# Altium PCB PCB1.PcbDoc
Units mm, origin at the board's own origin, x right, y up, seen from the top; angles counter-clockwise.
Board outline 40 x 40 mm, 2 copper layers (Top Layer, Bottom Layer); 64 components, 73 nets, 336 pads, 67 vias.
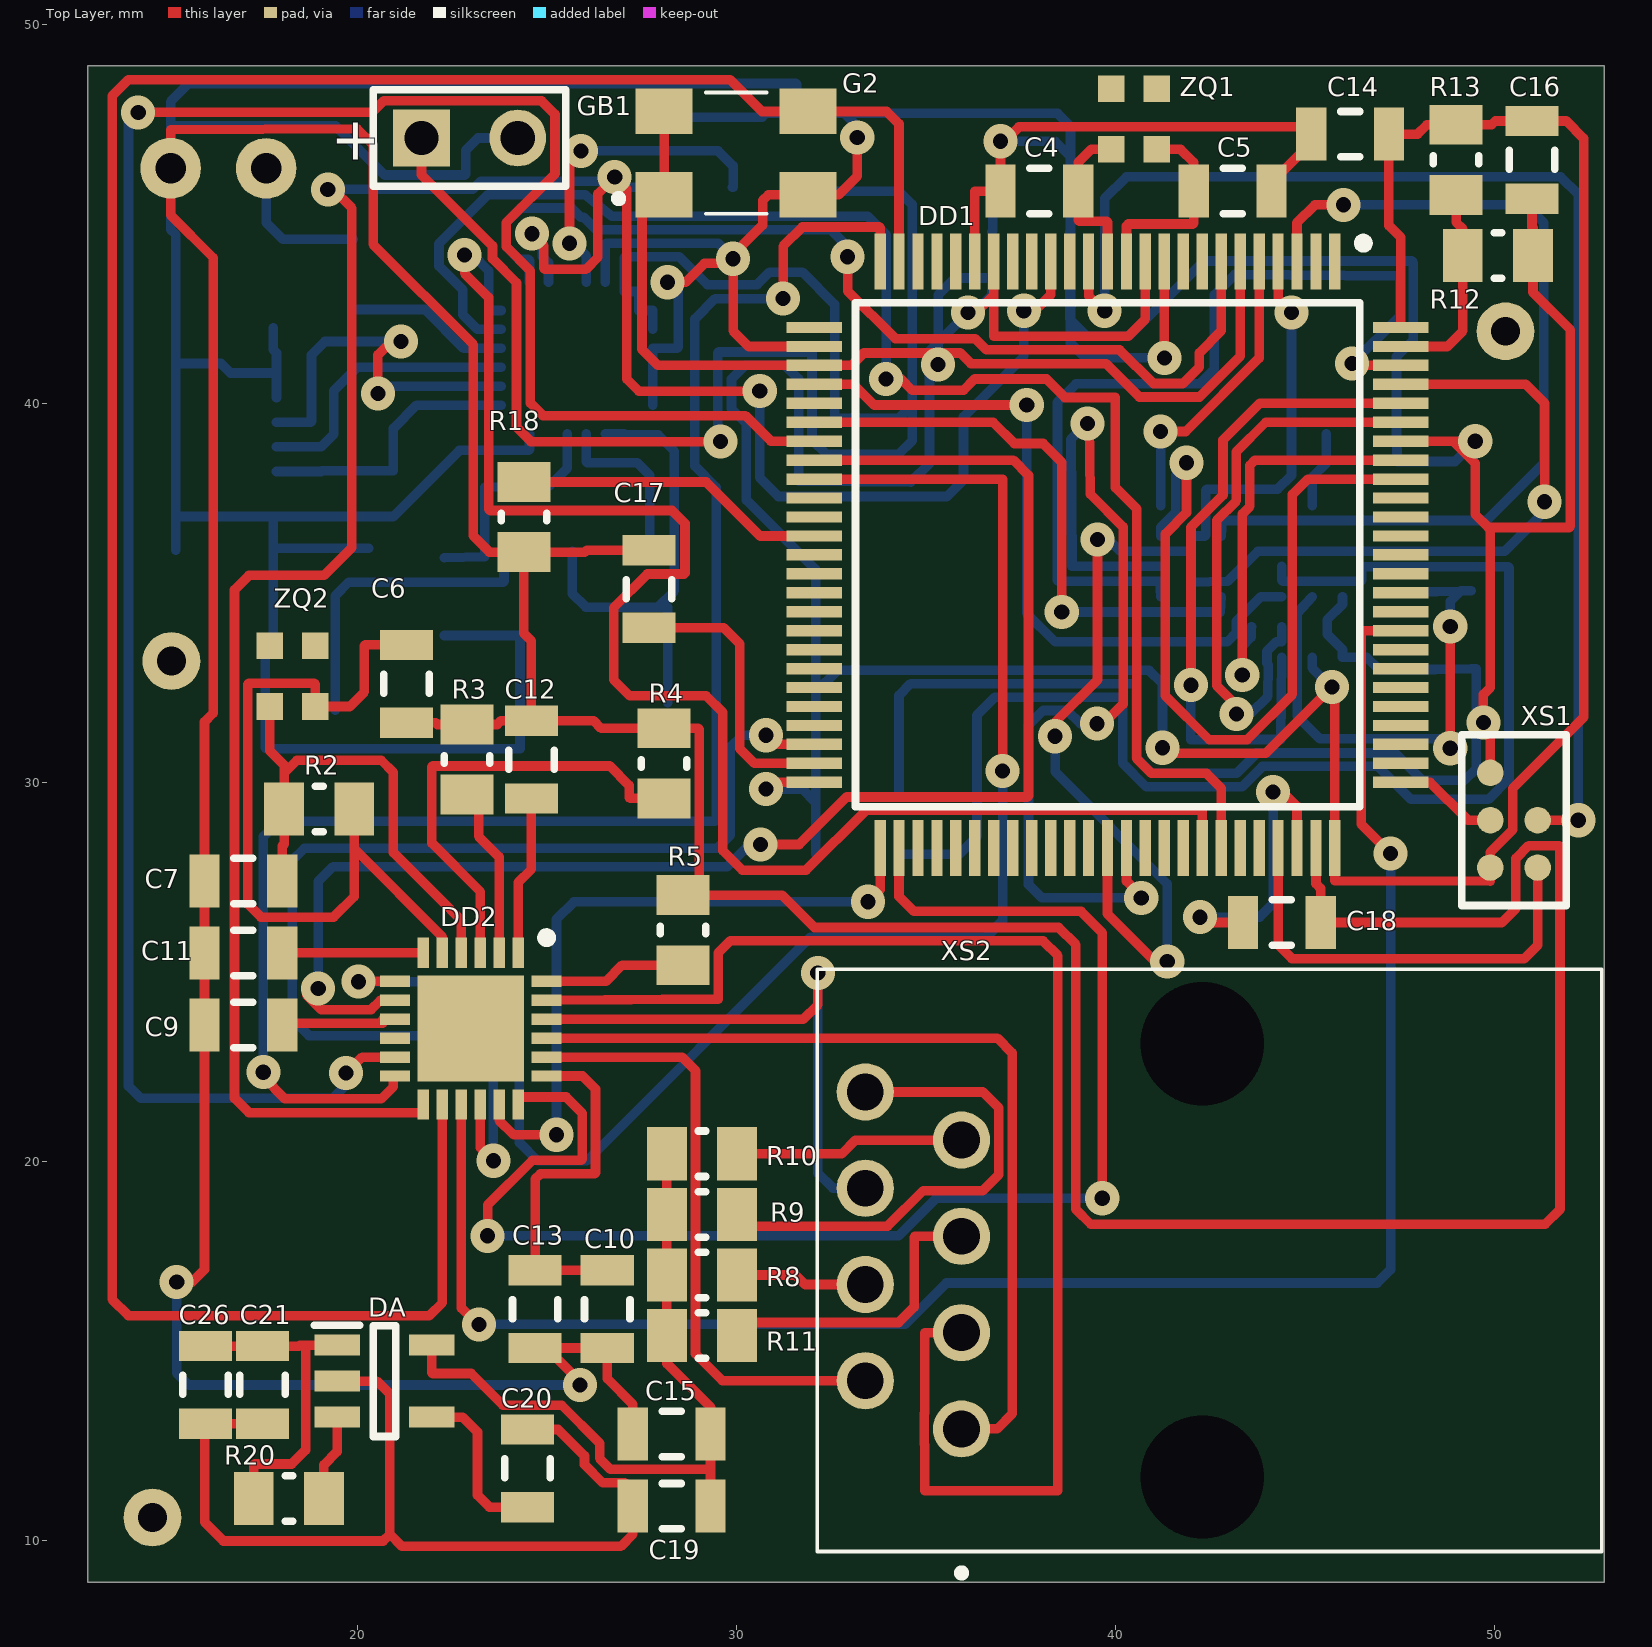
[diagram p0: Top Layer view]
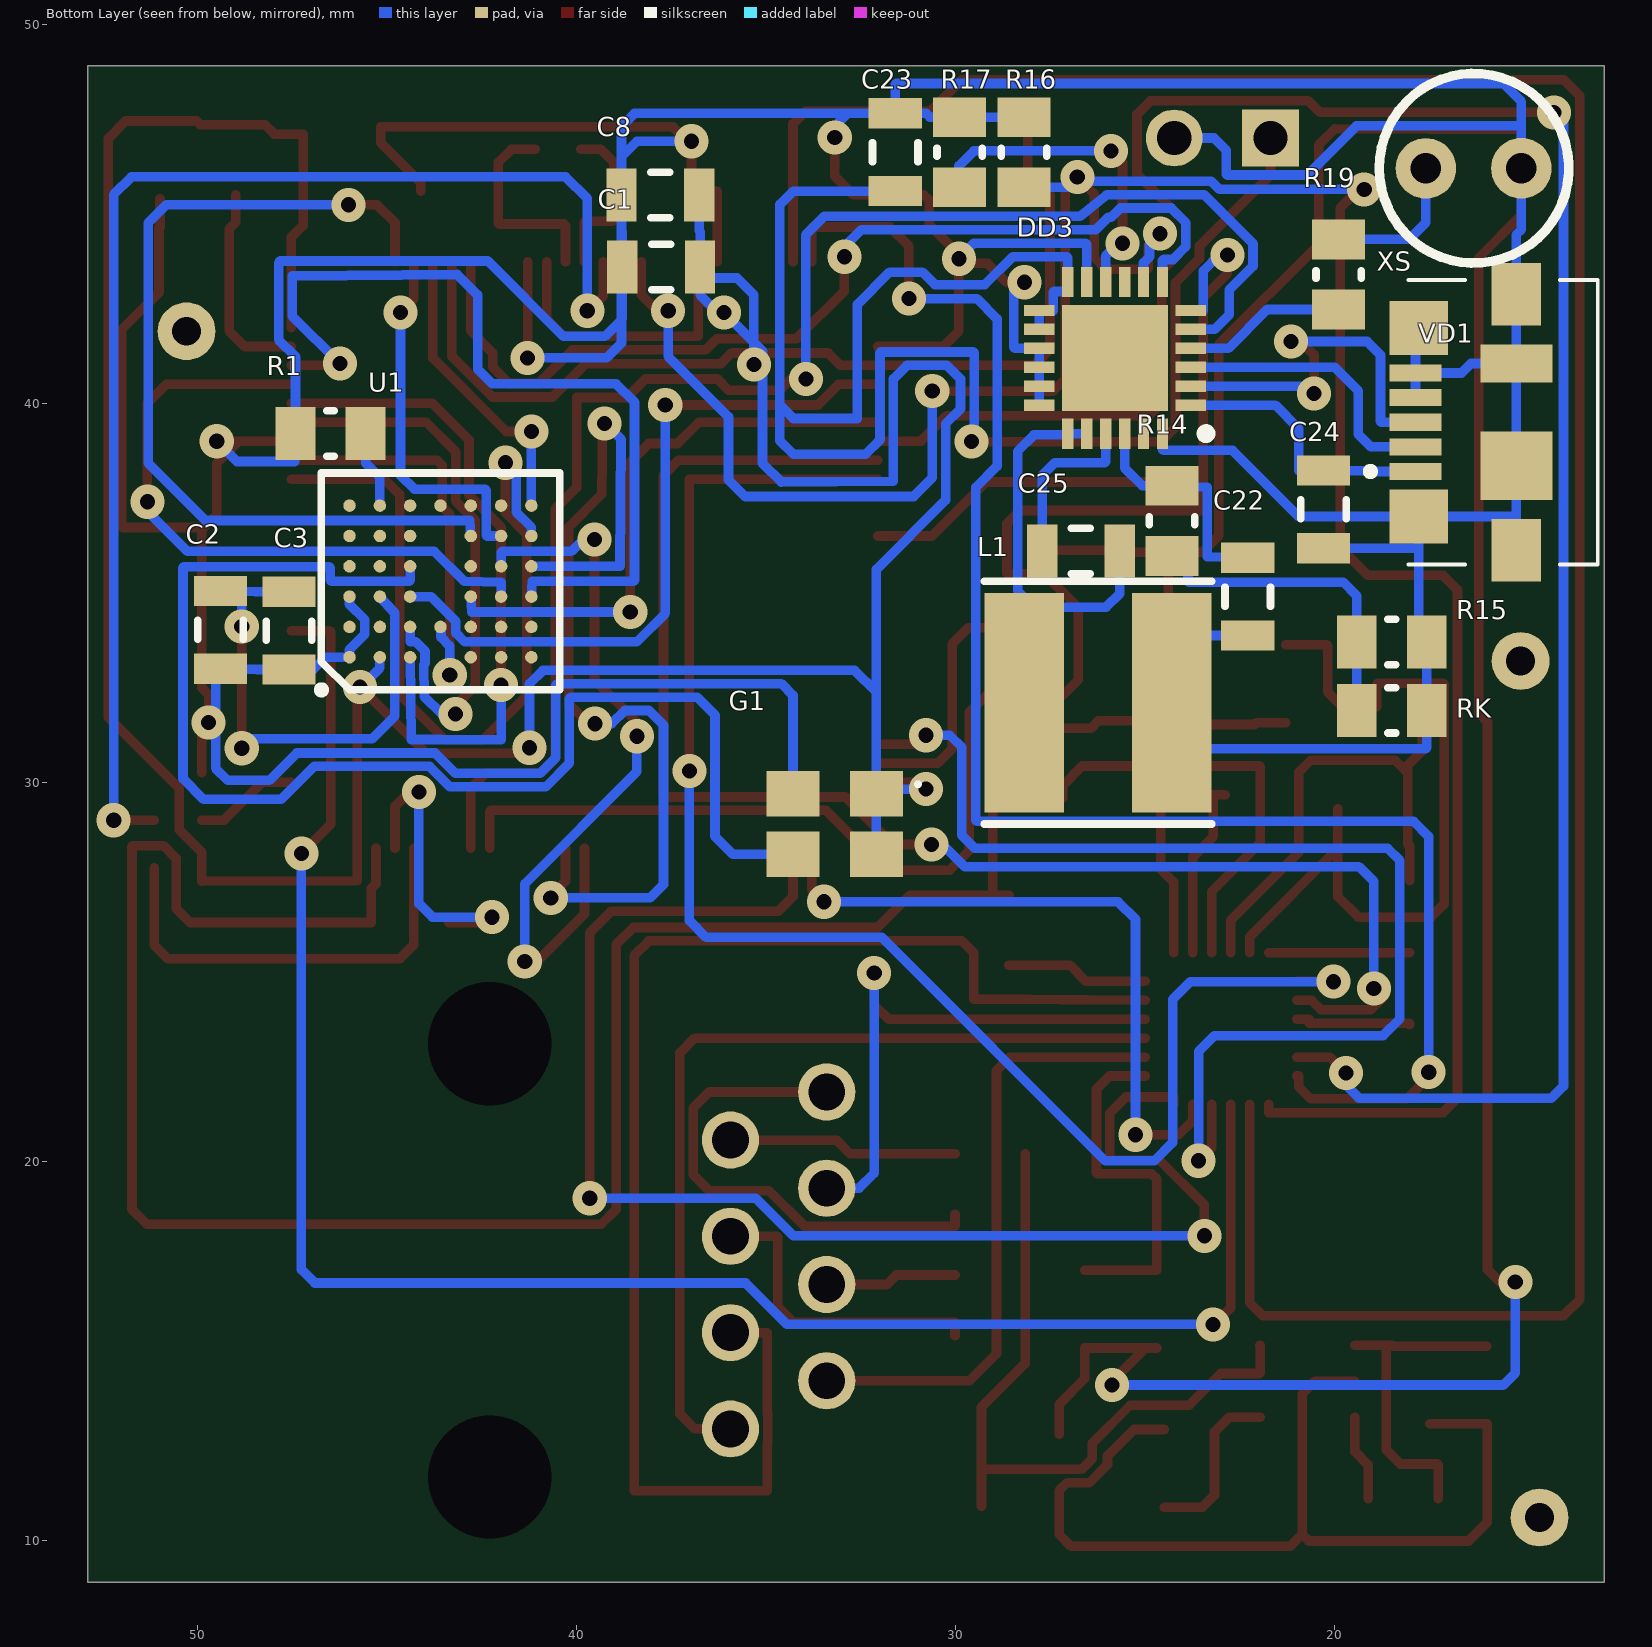
[diagram p1: Bottom Layer view, seen from below]

## Layer stack, top to bottom
Top Solder: solder mask 0.0102, Solder Resist, Dk 3.5
Top Layer: signal copper 0.0356
Dielectric 1: dielectric 0.32, FR-4, Dk 4.8
Bottom Layer: signal copper 0.0356
Bottom Solder: solder mask 0.0102, Solder Resist, Dk 3.5

## Board outline
52.9,8.9 12.9,8.9 12.9,48.9 52.9,48.9

## Design rules (kind name [scope] priority, off if disabled: settings)
Clearance [All] p1: gap=0.1 ignorepadtopadclearanceinfootprint=FALSE
ComponentClearance [All] p1: gap=0.1 collisioncheckmode=3 verticalgap=1 showdistances=FALSE
HoleSize [All] p1: absolutevalues=TRUE maxlimit=3.5 minlimit=0.4 maxpercent=80.000 minpercent=20.000
MinimumSolderMaskSliver [All] p1: minsoldermaskwidth=0.1
PolygonConnect [All] p1: connectstyle=Relief reliefconductorwidth=0.3 reliefentries=4 polygonreliefangle="90 Angle" airgapwidth=0.25
RoutingVias [All] p1: holewidth=0.4 width=0.9 viastyle="Through Hole" minholewidth=0.4 minwidth=0.9 maxholewidth=0.4 maxwidth=0.9
SilkToSolderMaskClearance [IsPad] p1: minsilkscreentomaskgap=0.2 clearancetoexposedcopper=TRUE
SolderMaskExpansion [All] p1: expansion=0.1
Width [All] p1: maxlimit=0.8 minlimit=0.2 preferedwidth=0.254
26 further rules are at their usual default settings.

## Classes and differential pairs
component class Sheet1: C1 C2 C3 C4 C5 C6 C7 C8 C9 C10 C11 C12 C13 C14 C15 C16 C17 C18 C19 C20 C21 C22 C23 C24 C25 C26 DA DD1 DD2 DD3 G1 G2 GB1 L1 R1 R2 R3 R4 R5 R8 R9 R10 R11 R12 R13 R14 R15 R16 R17 R18 R19 R20 RK U1 VD1 XS XS1 XS2 ZQ1 ZQ2

## Components (designator, comment, footprint, x,y, rotation, side; value= is the part's Value field where it differs from the comment)
C1 "" "0805 (Capacitor)" 37.775,43.6 r180 bottom
C2 "" "0805 (Capacitor)" 49.4,34.025 r90 bottom
C3 "" "0805 (Capacitor)" 47.6,34 r90 bottom
C4 "" "0805 (Capacitor)" 38,45.6 r0 top
C5 "" "0805 (Capacitor)" 43.1,45.6 r180 top
C6 "" "0805 (Capacitor)" 21.3,32.6 r90 top
C7 "" "0805 (Capacitor)" 17,27.4 r0 top
C8 "" "0805 (Capacitor)" 37.8,45.5 r0 bottom
C9 "" "0805 (Capacitor)" 17,23.6 r180 top
C10 "" "0805 (Capacitor)" 26.6,16.1 r90 top
C11 "" "0805 (Capacitor)" 17,25.5 r180 top
C12 "" "0805 (Capacitor)" 24.6,30.6 r90 top
C13 "" "0805 (Capacitor)" 24.7,16.1 r90 top
C14 "" "0805 (Capacitor)" 46.2,47.1 r180 top
C15 "" "0805 (Capacitor)" 28.3,12.8 r0 top
C16 "" "0805 (Capacitor)" 51,46.425 r270 top
C17 "" "0805 (Capacitor)" 27.7,35.1 r90 top
C18 "" "0805 (Capacitor)" 44.4,26.3 r0 top
C19 "" "0805 (Capacitor)" 28.3,10.9 r180 top
C20 "" "0805 (Capacitor)" 24.5,11.9 r90 top
C21 "" "0805 (Capacitor)" 17.5,14.1 r90 top
C22 "" "0805 (Capacitor)" 22.3,34.9 r270 bottom
C23 "" "0805 (Capacitor)" 31.6,46.625 r90 bottom
C24 "" "0805 (Capacitor)" 20.3,37.2 r270 bottom
C25 "" "0805 (Capacitor)" 26.7,36.1 r0 bottom
C26 "" "0805 (Capacitor)" 16,14.1 r90 top
DA "AP2202K-ADJTRG1" SOT95P280X145-5N 20.725,14.2 r0 top
DD1 "STM32F407VGT6" QFP50P1600X1600X160-100N 39.8,36 r270 top
DD2 "LAN8720ACP" QFN50P400X400X100-25N-D 23,23.5 r270 top
DD3 "BQ24295RGER" QFN50P400X400X100-25N-D 25.8,41.2 r0 bottom
G1 "403C11A24M00000" 403C11A20M00000 33.2,28.9 r0 bottom
G2 "405C11A25M00000" 405C11A25M00000 30,46.6 r0 top
GB1 "" Battery 18.43,47.818 r0 top
L1 "Fixed inductor, , , 0603, 50mA, -55...+125°C" "IND: SDR0604" 26.25,32.1 r0 bottom
R1 "" "0805 (Resistor)" 46.5,39.2 r180 bottom
R2 "" "0805 (Resistor)" 19,29.3 r180 top
R3 "" "0805 (Resistor)" 22.9,30.6 r270 top
R4 "" "0805 (Resistor)" 28.1,30.5 r270 top
R5 "" "0805 (Resistor)" 28.6,26.1 r90 top
R8 "" "0805 (Resistor)" 29.1,17 r0 top
R9 "" "0805 (Resistor)" 29.1,18.6 r0 top
R10 "" "0805 (Resistor)" 29.1,20.2 r0 top
R11 "" "0805 (Resistor)" 29.1,15.4 r0 top
R12 "" "0805 (Resistor)" 50.1,43.9 r180 top
R13 "" "0805 (Resistor)" 49,46.425 r90 top
R14 "" "0805 (Resistor)" 24.3,36.9 r90 bottom
R15 "" "0805 (Resistor)" 18.5,33.7 r0 bottom
R16 "" "0805 (Resistor)" 28.2,46.625 r90 bottom
R17 "" "0805 (Resistor)" 29.9,46.625 r270 bottom
R18 "" "0805 (Resistor)" 24.4,37 r90 top
R19 "" "0805 (Resistor)" 19.9,43.4 r90 bottom
R20 "" "0805 (Resistor)" 18.2,11.1 r180 top
RK "" "0805 (Resistor)" 18.5,31.9 r0 bottom
U1 "OV9655(2640)" BGA38C80P6X7_572X628X96 43.6,35.3 r90 bottom
VD1 "LED, Green, *, *, *, -55...+150°C" LED 18.33,44.202 r180 bottom
XS "0473461001" 0473461001 15.9,39.5 r90 bottom
XS1 "SWD" SWD 50.4,28.5 r90 top
XS2 "SS-6488-FLS" SS6488FLS 35.95,12.94 r90 top
ZBOAS141392602 "Comment" "BOASVIEWdrill:Таблица отверстий:0:0:0:0" 35.9,2352.1 r0 top
ZBOAS268594952 "Слой 1" "BOASVIEWlayer:Top Layer:2:1:1:1" 68.2,2411.8 r0 top (schematic designator fewf)
ZBOAS743798106 "Comment" "BOASVIEWside:Вид платы слева:2:0:0:0" 188.9,2491.9 r0 top
ZBOAS923294952 "Слой 2" "BOASVIEWlayer:Bottom Layer:2:1:32:1" 234.5,2411.8 r0 top (schematic designator fewf)
ZQ1 "Crystal, , 6pF, ±50ppm, case 2016, -30...+85°C" "OSC: 2016" 40.5,47.5 r90 top
ZQ2 "Crystal, , 6pF, ±50ppm, case 2016, -30...+85°C" "OSC: 2016" 18.3,32.8 r90 top

## Footprints (in the part's own frame and the unit in brackets; to place one, negate y for a bottom-side part, rotate by r counter-clockwise, add the part's x,y. Pads: shape width x height; smd on the part's side, far side on the other; paste and mask are expansions set on the pad)
403C11A20M00000 [mm]
  rect 1.4x1.2 smd: 1(-1.1,-0.8) 2(1.1,-0.8) 3(1.1,0.8) 4(-1.1,0.8)
  silkscreen extent -2.25,-1.1 -2.15,-1, body extent -1.68,-1.28 1.68,1.28, height 0.85
405C11A25M00000 [mm]
  rect 1.5x1.2 smd: 1(-1.9,-1.1) 2(1.9,-1.1) 3(1.9,1.1) 4(-1.9,1.1)
  silkscreen extent -3.2,-1.6 0.8,1.6, body extent -2.53,-1.6 2.53,1.6, height 1.1
"0805 (Capacitor)" [mm] "Chip Capacitor, 2-Leads, Body 2,00x1,25mm, IPC Medium Density"
  rect 0.8x1.4 smd: 1(-1.025,0) 2(1.025,0)
  silkscreen extent -0.25,-0.6 0.25,0.6, body extent -0.97,-0.62 1.03,0.63, height 0.78
"0805 (Resistor)" [mm] "Chip Resistor, 2-Leads, Body 2,10x1,30mm, IPC Medium Density"
  rect 1.05x1.4 smd: 1(-0.925,0) 2(0.925,0)
  silkscreen extent -0.1,-0.6 0.1,0.6, body extent -0.98,-0.63 1.02,0.62, height 0.5
0473461001 [mm]
  rect 0.45x1.38 smd: 1(-1.3,1.975) 2(-0.65,1.975) 3(0,1.975) 4(0.65,1.975) 5(1.3,1.975)
  rect 1.425x1.55 smd: MP1(-2.487,1.89) MP2(2.487,1.89)
  rect 1.65x1.3 smd: MP3(-3.375,-0.685) MP6(3.375,-0.685)
  rect 1.8x1.9 smd: MP4(-1.15,-0.685)
  rect 1x1.9 smd: MP5(1.55,-0.685)
  silkscreen extent -3.75,-2.83 3.75,3.26, body extent -3.9,-2.5 3.9,2.5, height 2.72
Battery [mm]
  rect 1.5x1.5 hole 0.9: 1(3.27,-0.818)
  round 1.5 hole 0.9: 2(5.81,-0.818)
  silkscreen extent 2,-2.09 7.08,0.45, body extent 2,-8.17 7.08,0.45, height 5.85
BGA38C80P6X7_572X628X96 [mm]
  round 0.33 smd: A1(-2,2.4) A2(-1.2,2.4) A3(-0.4,2.4) A4(0.4,2.4) A5(1.2,2.4) A6(2,2.4) B1(-2,1.6) B2(-1.2,1.6) B3(-0.4,1.6) B4(0.4,1.6) B5(1.2,1.6) B6(2,1.6) C1(-2,0.8) C2(-1.2,0.8) C3(-0.4,0.8) C4(0.4,0.8) C5(1.2,0.8) C6(2,0.8) D2(-1.2,0) D6(2,0) E1(-2,-0.8) E2(-1.2,-0.8) E3(-0.4,-0.8) E4(0.4,-0.8) E5(1.2,-0.8) E6(2,-0.8) F1(-2,-1.6) F2(-1.2,-1.6) F3(-0.4,-1.6) F4(0.4,-1.6) F5(1.2,-1.6) F6(2,-1.6) G1(-2,-2.4) G2(-1.2,-2.4) G3(-0.4,-2.4) G4(0.4,-2.4) G5(1.2,-2.4) G6(2,-2.4)
  silkscreen extent -2.96,-3.14 2.86,3.24, body extent -2.86,-3.14 2.86,3.14, height 0.96
"BOASVIEWdrill:Таблица отверстий:0:0:0:0" [mm]
"BOASVIEWlayer:Bottom Layer:2:1:32:1" [mm]
"BOASVIEWlayer:Top Layer:2:1:1:1" [mm]
"BOASVIEWside:Вид платы слева:2:0:0:0" [mm]
"IND: SDR0604" [mm]
  rect 2.1x5.8 smd: 1(-1.95,0) 2(1.95,0)
  silkscreen extent -3,-3.2 3,3.2, body extent -2.9,-2.9 2.9,2.9, height 4.8
LED [mm]
  round 1.6 hole 0.8: 1(0.73,1.998) 2(3.25,2)
  silkscreen extent -0.5,-0.5 4.5,4.5, body extent 0.01,0.5 3.99,3.99, height 5.38
"OSC: 2016" [mm]
  rect 0.7x0.7 smd: 1(-0.8,-0.6) 2(-0.8,0.6) 3(0.8,0.6) 4(0.8,-0.6)
  round 0.5 on Top Overlay: ""(-1.6,-0.6)
  body extent -1,-0.8 1,0.8, height 0.65
QFN50P400X400X100-25N-D [mm]
  rect 0.8x0.3 smd: 1(-2,1.25) 2(-2,0.75) 3(-2,0.25) 4(-2,-0.25) 5(-2,-0.75) 6(-2,-1.25) 13(2,-1.25) 14(2,-0.75) 15(2,-0.25) 16(2,0.25) 17(2,0.75) 18(2,1.25)
  rect 0.3x0.8 smd: 7(-1.25,-2) 8(-0.75,-2) 9(-0.25,-2) 10(0.25,-2) 11(0.75,-2) 12(1.25,-2) 19(1.25,2) 20(0.75,2) 21(0.25,2) 22(-0.25,2) 23(-0.75,2) 24(-1.25,2)
  rect 2.8x2.8 smd: 25(0,0)
  silkscreen extent -2.52,1.88 -2.28,2.13, body extent -2,-2 2,2, height 1
QFP50P1600X1600X160-100N [mm]
  rect 1.475x0.3 smd: 1(-7.738,6) 2(-7.738,5.5) 3(-7.738,5) 4(-7.738,4.5) 5(-7.738,4) 6(-7.738,3.5) 7(-7.738,3) 8(-7.738,2.5) 9(-7.738,2) 10(-7.738,1.5) 11(-7.738,1) 12(-7.738,0.5) 13(-7.738,0) 14(-7.738,-0.5) 15(-7.738,-1) 16(-7.738,-1.5) 17(-7.738,-2) 18(-7.738,-2.5) 19(-7.738,-3) 20(-7.738,-3.5) 21(-7.738,-4) 22(-7.738,-4.5) 23(-7.738,-5) 24(-7.738,-5.5) 25(-7.738,-6) 51(7.738,-6) 52(7.738,-5.5) 53(7.738,-5) 54(7.738,-4.5) 55(7.738,-4) 56(7.738,-3.5) 57(7.738,-3) 58(7.738,-2.5) 59(7.738,-2) 60(7.738,-1.5) 61(7.738,-1) 62(7.738,-0.5) 63(7.738,0) 64(7.738,0.5) 65(7.738,1) 66(7.738,1.5) 67(7.738,2) 68(7.738,2.5) 69(7.738,3) 70(7.738,3.5) 71(7.738,4) 72(7.738,4.5) 73(7.738,5) 74(7.738,5.5) 75(7.738,6)
  rect 0.3x1.475 smd: 26(-6,-7.738) 27(-5.5,-7.738) 28(-5,-7.738) 29(-4.5,-7.738) 30(-4,-7.738) 31(-3.5,-7.738) 32(-3,-7.738) 33(-2.5,-7.738) 34(-2,-7.738) 35(-1.5,-7.738) 36(-1,-7.738) 37(-0.5,-7.738) 38(0,-7.738) 39(0.5,-7.738) 40(1,-7.738) 41(1.5,-7.738) 42(2,-7.738) 43(2.5,-7.738) 44(3,-7.738) 45(3.5,-7.738) 46(4,-7.738) 47(4.5,-7.738) 48(5,-7.738) 49(5.5,-7.738) 50(6,-7.738) 76(6,7.738) 77(5.5,7.738) 78(5,7.738) 79(4.5,7.738) 80(4,7.738) 81(3.5,7.738) 82(3,7.738) 83(2.5,7.738) 84(2,7.738) 85(1.5,7.738) 86(1,7.738) 87(0.5,7.738) 88(0,7.738) 89(-0.5,7.738) 90(-1,7.738) 91(-1.5,7.738) 92(-2,7.738) 93(-2.5,7.738) 94(-3,7.738) 95(-3.5,7.738) 96(-4,7.738) 97(-4.5,7.738) 98(-5,7.738) 99(-5.5,7.738) 100(-6,7.738)
  silkscreen extent -8.35,-6.65 6.65,6.88, body extent -8,-8 8,8, height 1.6
SOT95P280X145-5N [mm]
  rect 1.2x0.55 smd: 1(-1.25,0.95) 2(-1.25,0) 3(-1.25,-0.95) 4(1.25,-0.95) 5(1.25,0.95)
  silkscreen extent -1.85,-1.46 0.3,1.48, body extent -1.4,-1.46 1.4,1.46, height 1.45
SS6488FLS [mm]
  round 1.509 hole 0.97: 1(0,0) 2(1.27,2.54) 3(2.54,0) 4(3.81,2.54) 5(5.08,0) 6(6.35,2.54) 7(7.62,0) 8(8.89,2.54)
  round 1.625 hole 3.25 unplated: MH1(-1.27,-6.35) MH2(10.16,-6.35)
  silkscreen extent -3.9,-16.89 12.12,3.81, body extent -3.24,-16.89 12.12,3.81, height 11.15
SWD [mm]
  round 0.7 smd: 1(-0.75,0.5) 2(0.5,0.5) 3(1.75,0.5) 4(-0.75,-0.75) 5(0.5,-0.75)
  silkscreen extent -1.75,-1.5 2.75,1.25

## Part data
C1 C2 C3 C4 C5 C6 C7 C8 C9 C10 C11 C12 C13 C14 C15 C16 C17 C18 C19 C20 C21 C22 C23 C24 C25 C26: library part Condensator
DA: "Power Supply", Manufacturer_Name="Diodes Inc.", Mouser Part Number=621-AP2202K-ADJTRG1, Arrow Part Number=AP2202K-ADJTRG1, Arrow Price/Stock=https://www.arrow.com/en/products/ap2202k-adjtrg1/diodes-incorporated, Datasheet Link=https://datasheet.datasheetarchive.com/originals/distributors/Datasheets_SAMA/e861ef6f8b654668a5f87b1391b432c9.pdf, Height=1.45mm, Manufacturer_Part_Number=AP2202K-ADJTRG1, Mouser Price/Stock=https://www.mouser.co.uk/ProductDetail/Diodes-Incorporated/AP2202K-ADJTRG1/?qs=x6A8l6qLYDCHGTWtscGpkA%3D%3D
DD1: "Integrated Circuit", Manufacturer_Name=STMicroelectronics, Mouser Part Number=511-STM32F407VGT6, Arrow Part Number=STM32F407VGT6, Arrow Price/Stock=https://www.arrow.com/en/products/stm32f407vgt6/stmicroelectronics?region=nac, Datasheet Link=http://www.st.com/web/en/resource/technical/document/datasheet/DM00037051.pdf, Height=1.6mm, Manufacturer_Part_Number=STM32F407VGT6, Mouser Price/Stock=https://www.mouser.co.uk/ProductDetail/STMicroelectronics/STM32F407VGT6?qs=Z8%252BeY1k3TIKAEQqwbO%2FOzA%3D%3D
DD2: "Integrated Circuit", Manufacturer_Name=Microchip, Datasheet Link=http://ww1.microchip.com/downloads/en/DeviceDoc/8720a.pdf, Height=1mm, Manufacturer_Part_Number=LAN8720ACP
DD3: "Integrated Circuit", Manufacturer_Name="Texas Instruments", Mouser Part Number=595-BQ24295RGER, Arrow Part Number=BQ24295RGER, Arrow Price/Stock=https://www.arrow.com/en/products/bq24295rger/texas-instruments, Datasheet Link=http://www.ti.com/lit/ds/symlink/bq24295.pdf, Height=1mm, Manufacturer_Part_Number=BQ24295RGER, Mouser Price/Stock=https://www.mouser.co.uk/ProductDetail/Texas-Instruments/BQ24295RGER?qs=igp4D3uu33JuaPeRfsSg2w%3D%3D
G1: "Crystal or Oscillator", Manufacturer_Name=CTS, Mouser Part Number=774-403C11A24M00000, Arrow Part Number=403C11A24M00000, Arrow Price/Stock=https://www.arrow.com/en/products/403c11a24m00000/cts, Datasheet Link=https://datasheet.datasheetarchive.com/originals/dk/DKDS-12/236325.pdf, Height=0.75mm, Manufacturer_Part_Number=403C11A24M00000, Mouser Price/Stock=https://www.mouser.co.uk/ProductDetail/CTS-Electronic-Components/403C11A24M00000?qs=9D%2FjjU8ZSZ6G6K4SP5chGw%3D%3D
G2: "Crystal or Oscillator", Manufacturer_Name=CTS, Mouser Part Number=774-405C11A25M00000, Arrow Part Number=405C11A25M00000, Arrow Price/Stock=https://www.arrow.com/en/products/405c11a25m00000/cts, Datasheet Link=https://componentsearchengine.com/Datasheets/1/405C11A25M00000.pdf, Height=1mm, Manufacturer_Part_Number=405C11A25M00000, Mouser Price/Stock=https://www.mouser.com/Search/Refine.aspx?Keyword=774-405C11A25M00000
GB1: library part Battery
L1: library part Inductor_0603, Manufacturer="Murata Electronics", MaxCurrent=50mA, Package=0603, PartNumber=LQM18FN100M00D, Temperature=-55...+125°C, TypeInductor="Fixed inductor", HelpURL=https://www.digikey.com/product-detail/en/murata-electronics-north-america/LQM18FN100M00D/490-4025-1-ND/1016285, ValueManufacturerPartNumber="Fixed inductor, , , 0603, 50mA, -55...+125°C"
R1 R2 R3 R4 R5 R8 R9 R10 R11 R12 R13 R14 R15 R16 R17 R18 R19 R20: library part Resistor
RK: library part Resistor_termo
U1: library part OV2640-VL9A, "Integrated Circuit", Manufacturer_Name=Omnivision, Datasheet Link=https://www.uctronics.com/download/cam_module/OV2640DS.pdf, Height=0.965mm, Manufacturer_Part_Number=OV2640-VL9A
VD1: library part LED_single, ColorParameter=Green, Temperature=-55...+150°C, TypeDiode=LED, ValueManufacturerPartNumber="LED, Green, *, *, *, -55...+150°C"
XS: "Connector", Manufacturer_Name=Molex, Mouser Part Number=N/A, Arrow Part Number=0473461001, Arrow Price/Stock=https://www.arrow.com/en/products/0473461001/molex?region=nac, Datasheet Link=https://componentsearchengine.com/Datasheets/1/0473461001.pdf, Height=2.45mm, Manufacturer_Part_Number=0473461001, Mouser Price/Stock=https://www.mouser.co.uk/ProductDetail/Molex/0473461001?qs=2bnkQPT%252BPafTZgGVt%2FOGfA%3D%3D
XS2: "Connector", Manufacturer_Name=Bel, Mouser Part Number=530-SS-6488-FLS, Datasheet Link=https://www.mouser.com/datasheet/2/643/dr-STW-SS-6488-FLS-1155125.pdf, Height=11.05mm, Manufacturer_Part_Number=SS-6488-FLS
ZQ1 ZQ2: library part Crystal_2016, LoadCapacitance=6pF, Manufacturer="Murata Electronics", Package="case 2016", PartNumber=XRCGB25M000F0L00R0, Temperature=-30...+85°C, Tolerance=±50ppm, HelpURL=https://www.digikey.com/product-detail/en/murata-electronics-north-america/XRCGB25M000F0L00R0/490-5577-1-ND/2368391, TypeOscilator=Crystal, ValueManufacturerPartNumber="Crystal, , 6pF, ±50ppm, case 2016, -30...+85°C"

## Free pads (board coordinates)
  oval 1.525x1.525 hole 0.762 unplated: 1(14.6,10.6) 2(50.3,41.9) 4(15.1,33.2)

## Via types
v1: diameter 0.9, hole 0.4, Top Layer to Bottom Layer, 67 vias

## Nets (pads, with @x,y where several pads share a name; then routed paths per layer and width w, separated by ;. In a path a pad name is that pad's centre, name@x,y a point inside that pad or via, vN(x,y) a via of type N, cw(c..) or ccw(c..) an arc to the next point about the centre after c; other vN are vias at no path point)
+2.5V: C2.2 C3.2 U1.B3 | length 13.9
  Top Layer w0.254: v1(48.844,30.899) v1(48.844,34.112)
  Bottom Layer w0.254: U1.B3 44.806,34.468 44.806,31.745 45.402,31.148 48.595,31.148 v1(48.844,30.899) ; C3.2 48.488,35.025 C2.2@49.109,35.042 ; v1@48.783,34.269 v1(48.844,34.112) 48.844,34.777 C2.2@49.109,35.042 ; C2.2 49.117,35.05 C2.2@49.109,35.042
+3.3V: C1.2 C8.1 C14.1 C16.1 DD1.6 DD1.11 DD1.19 DD1.28 DD1.50 DD1.75 DD1.100 G1.1 G1.4 G2.1 G2.4 R13.2 U1.B1 XS1.1 | length 129.2
  Top Layer w0.254: G2.4 G2.1 27.517,45.5 27.517,41.423 27.94,41 DD1.28 33.045,41 33.371,41.326 v1@35.027,41.326 ; v1(30.785,29.82) 30.965,30 DD1.50 ; v1(35.331,41.021) v1@35.027,41.326 ; v1(36.119,42.393) 36.33,42.393 36.8,42.862 ; DD1.19 36.8,42.862 ; DD1.11 40.8,42.227 40.339,41.766 36.8,41.766 36.8,42.862 ; v1(41.25,30.912) 41.392,30.769 43.977,30.769 v1(45.72,32.512) 45.8,32.432 DD1.75 45.8,27.407 49.899,27.393 ; DD1.6 43.3,41.24 42.227,40.168 40.64,40.168 39.761,41.046 36.195,41.046 35.916,41.326 v1@35.027,41.326 ; DD1.100 47.538,44.374 47.225,44.687 C14.1 47.981,47.1 48.231,47.35 R13.2 49.936,47.35 50.036,47.45 C16.1 51.904,47.45 52.364,46.99 52.364,31.714 50.495,29.845 50.495,28.753 49.9,28.158 XS1.1 49.9,27.393
  Bottom Layer w0.254: v1(30.785,29.82) 31.75,29.82 G1.1@32.1,29.47 ; G1.4 G1.1@32.1,29.47 ; v1(35.331,41.021) 35.331,41.605 ; v1(36.119,42.393) 35.331,41.605 ; v1@36.28,42.393 36.75,42.862 C1.2@36.75,43.307 ; C8.1 36.775,44.551 36.75,44.526 C1.2 C1.2@36.75,43.307 ; v1(41.25,30.912) 41.25,32.6 40.894,32.956 32.671,32.956 32.1,32.385 ; U1.B1 45.2,33.02 45.708,32.512 v1(45.72,32.512) ; G1.1@32.1,29.47 G1.1 32.1,32.385 ; 32.1,32.385 32.1,35.616 30.271,37.445 30.271,39.461 29.879,39.853 29.879,40.64 30.239,41 31.289,41 31.648,40.64 31.648,37.948 34.608,37.922 35.103,38.417 35.103,41.377 35.331,41.605 ; 35.331,41.605 35.331,42.862 35.776,43.307 C1.2@36.75,43.307
GND: C1.1 C2.1 C3.1 C4.1 C5.1 C6.1 C7.1 C8.2 C9.2 C10.1 C11.2 C12.2 C13.1 C14.2 C15.1 C16.2 C17.2 C18.2 C22.2 C23.2 C24.2 DD1.10 DD1.20 DD1.27 DD1.74 DD1.94 DD3.11 DD3.15 DD3.16 DD3.17 DD3.18 DD3.24 G1.2 G2.2 GB1.2 L1.1 R1.1 R3.1 R4.1 R5.2 R12.1 R15.1 R16.2 R17.1 R18.1 RK.1 U1.A1 U1.A3 VD1.2 XS1.3 XS.4 XS.5 XS.MP1 XS.MP2 XS.MP3 XS.MP4 XS.MP5 XS.MP6 | length 346.2
  Top Layer w0.254: v1(15.24,16.815) 15.645,16.815 15.975,17.145 C9.2 C11.2 15.975,26.441 C7.1 15.975,31.596 16.205,31.826 16.205,43.84 15.08,44.966 VD1.2 15.08,47.219 20.002,47.244 20.422,46.825 20.422,44.196 23.069,41.549 23.069,36.501 23.495,36.075 R18.1 ; C6.1 22.073,31.575 22.123,31.525 R3.1 23.698,31.525 23.798,31.625 C12.2 ; C13.1 C13.1@25,15.075 ; v1(25.883,14.097) 25.883,14.192 C13.1@25,15.075 ; C15.1 27.275,13.589 26.6,14.264 C10.1 C13.1@25,15.075 ; C17.2 26.06,36.125 26.01,36.075 R18.1 ; v1(28.194,43.193) 28.664,43.193 29.163,43.691 29.798,43.691 v1(29.921,43.815) ; R5.2 R5.2@29.027,27.025 ; DD1.27 30.331,41.5 29.921,41.91 v1(29.921,43.815) ; v1(33.198,47.015) 33.198,45.995 32.703,45.5 G2.2 30.849,45.5 30.7,45.351 30.7,44.7 29.921,43.921 v1(29.921,43.815) ; DD1.20 36.3,45.6 C4.1 v1@36.975,46.805 ; v1(36.975,46.914) v1@36.975,46.805 ; v1(41.3,41.199) DD1.10 ; C5.1 44.125,45.822 45.175,46.872 C14.2 45.175,47.295 37.465,47.295 v1@36.975,46.805 ; DD1.74 45.3,27.328 45.425,27.203 C18.2 50.203,26.3 50.573,26.67 50.573,27.989 50.911,28.327 51.714,28.327 51.74,28.302 51.74,18.732 51.346,18.339 39.357,18.339 38.964,18.732 38.964,25.717 38.51,26.171 32.067,26.171 31.213,27.025 R5.2@29.027,27.025 ; DD1.94 48.92,39 ; v1(49.503,39) 48.92,39 ; v1(49.718,31.576) 49.718,32.317 49.9,32.5 49.9,36.672 49.847,36.724 ; XS1.3 v1@49.9,31.576 ; C16.2 51,44.653 51.025,44.628 R12.1 51.025,42.926 52.01,41.941 52.01,36.754 51.981,36.724 49.847,36.724 ; R18.1 24.4,33.931 24.6,33.731 C12.2 ; C12.2 26.238,31.625 26.438,31.425 R4.1 28.996,31.425 29.027,31.394 R5.2@29.027,27.025 ; 48.92,39 49.503,38.417 49.503,37.069 49.847,36.724
  Bottom Layer w0.254: XS.MP3 15.215,36.982 ; v1(15.24,16.815) 15.24,14.414 15.557,14.097 v1(25.883,14.097) ; XS.MP2 17.79,41.411 17.875,41.326 XS.5 ; XS.4 XS.5 ; C24.2 17.831,36.175 17.79,36.216 ; C22.2 24.3,33.875 L1.1 24.3,30.886 17.6,30.886 17.575,30.912 RK.1 R15.1 17.79,33.863 17.79,36.216 ; GB1.2 23.192,47 22.864,46.672 22.864,46.05 22.837,46.023 20.726,46.023 19.429,47.32 15.105,47.32 15.08,47.295 ; DD3.24 24.55,38.786 24.525,38.76 22.703,38.76 20.955,37.013 XS.MP1 ; DD3.11 26.55,44.196 26.578,44.224 29.527,44.224 29.921,43.83 v1(29.921,43.815) ; DD3.18 DD3.17 DD3.16 DD3.15 28.448,41.45 28.473,41.475 28.473,43.167 28.448,43.193 v1(28.194,43.193) ; R16.2 29.032,47.55 R17.1 30.683,47.55 30.783,47.65 C23.2 ; v1(33.198,47.015) 33.198,47.307 32.855,47.65 ; G1.2 34.3,32.294 34.608,32.602 40.515,32.602 40.553,32.563 40.553,30.651 40.969,30.235 43.204,30.235 43.744,30.774 47.391,30.774 48.113,30.052 49.212,30.052 49.53,30.37 v1@49.53,31.764 ; v1(36.975,46.914) 38.417,46.914 38.825,46.506 ; v1(41.3,41.199) 39.219,41.199 38.825,41.593 38.825,42.203 ; U1.A3 46,34.696 45.593,34.289 45.593,33.909 46,33.502 U1.A1 46.634,33.3 46.959,32.975 C3.1 48.45,32.975 C2.1 49.53,33 v1@49.53,31.764 ; v1(49.503,39) 48.967,38.465 47.441,38.465 R1.1 47.425,41.23 47.869,41.674 47.869,43.713 47.828,43.754 42.348,43.754 40.361,41.766 39.261,41.766 38.825,42.203 ; v1(49.718,31.576) v1@49.53,31.764 ; 15.08,47.295 15.08,47.96 15.557,48.438 31.575,48.438 31.6,48.412 C23.2 ; 15.08,47.295 VD1.2 15.08,44.585 15.215,44.45 XS.MP6 XS.MP5 ; 15.215,36.982 15.246,37.013 XS.MP1 ; 15.215,36.982 XS.MP4 XS.MP5 ; XS.MP5 16.408,41.05 16.658,40.8 XS.5 ; 17.79,36.216 XS.MP1 ; C23.2 32.855,47.65 ; 32.855,47.65 38.482,47.65 38.825,47.307 38.825,46.506 ; 38.825,42.203 38.825,44.551 ; 38.825,42.203 38.8,42.227 C1.1 38.8,44.526 38.825,44.551 ; 38.825,44.551 C8.2 38.825,46.506
NetC4_2: C4.2 DD1.13 ZQ1.2 | length 4.4
  Top Layer w0.254: DD1.13 39.8,44.78 39.775,44.806 39.05,44.806 39.025,44.831 C4.2 39.025,46.355 39.37,46.7 ZQ1.2
NetC5_2: C5.2 DD1.12 ZQ1.1 | length 5.5
  Top Layer w0.254: DD1.12 40.3,44.679 40.351,44.729 42.05,44.729 42.075,44.755 C5.2 42.075,46.355 41.73,46.7 ZQ1.1
NetC6_2: C6.2 DD2.5 R2.1 ZQ2.1 | length 21.2
  Top Layer w0.254: R2.1 19.925,28.248 ; C6.2 20.218,33.625 20.193,33.6 20.193,32.385 19.808,32 ZQ2.1 18.9,32.588 18.875,32.614 17.145,32.614 17.12,32.588 17.12,26.784 17.462,26.441 19.379,26.441 19.925,26.987 19.925,28.248 ; DD2.5 22.25,25.923 19.925,28.248
NetC7_2: C7.2 DD2.4 R2.2 ZQ2.2 | length 13.4
  Top Layer w0.254: ZQ2.2 17.7,30.83 18.075,30.455 18.075,30.242 ; C7.2 18.025,28.321 18.075,28.371 R2.2 18.075,30.242 ; DD2.4 22.75,26.352 20.955,28.147 20.955,30.264 20.637,30.582 18.415,30.582 18.075,30.242
NetC9_1: C9.1 DD2.9 | length 3.1
  Top Layer w0.254: C9.1 18.025,23.647 20.676,23.647 20.676,23.75 DD2.9
NetC10_2: C10.2 C13.2 DD2.19 | length 9.6
  Top Layer w0.254: DD2.19 25.949,22.25 26.291,21.907 26.291,19.698 26.264,19.67 24.837,19.67 24.7,19.533 C13.2 C10.2
NetC11_1: C11.1 DD2.6 | length 3.7
  Top Layer w0.254: C11.1 DD2.6
NetC12_1: C12.1 DD2.1 | length 4.2
  Top Layer w0.254: DD2.1 24.25,27.356 24.6,27.706 C12.1
NetC15_2: C15.2 C19.1 DA.5 R8.1 R9.1 R10.1 R11.1 | length 20.1
  Top Layer w0.254: DA.5 21.971,15.15 21.971,14.427 21.996,14.402 23.012,14.402 23.851,13.564 25.4,13.564 26.4,12.564 26.4,12.161 26.688,11.873 29.288,11.873 29.325,11.836 C19.1 29.325,11.913 C15.2 29.325,13.513 28.175,14.663 R11.1 28.175,16.18 R8.1 28.175,17.78 R9.1 28.175,19.38 R10.1
NetC17_1: C17.1 DD1.49 | length 7.5
  Top Layer w0.254: C17.1 29.678,34.075 30.098,33.655 30.098,30.883 30.48,30.5 DD1.49
NetC18_1: C18.1 DD1.73 | length 8.1
  Top Layer w0.254: v1(42.24,26.441) 42.382,26.3 C18.1 ; v1(44.171,29.743) 44.421,29.743 44.8,29.364 DD1.73
  Bottom Layer w0.254: v1(42.24,26.441) 43.815,26.441 44.171,26.797 v1(44.171,29.743)
NetC19_2: C19.2 C20.2 C21.1 C26.1 DA.2 | length 25.9
  Top Layer w0.254: C21.1 16.739,13.075 C26.1 15.977,13.075 15.977,10.477 16.472,9.982 20.688,9.982 20.866,10.16 ; DA.2 20.523,14.2 20.866,13.857 20.866,10.16 ; C20.2 25.302,12.925 26,12.227 26,12 26.481,11.519 27.067,11.519 27.275,11.311 C19.2 27.275,10.16 26.957,9.842 21.184,9.842 20.866,10.16
NetC20_1: C20.1 DA.4 | length 4.5
  Top Layer w0.254: DA.4 22.784,13.25 23.177,12.856 23.177,11.193 23.495,10.875 C20.1
NetC21_2: C21.2 C26.2 DA.1 R20.2 | length 8.7
  Top Layer w0.254: C26.2 16.739,15.125 C21.2 18.466,15.125 18.491,15.15 18.669,15.15 ; R20.2 17.275,11.989 17.3,12.014 18.275,12.014 18.644,12.383 18.644,15.125 18.669,15.15 ; DA.1 18.669,15.15
NetC22_1: C22.1 DD3.22 R14.2 | length 6.5
  Bottom Layer w0.254: C22.1 23.368,35.95 23.368,37.782 24.3,37.813 R14.2@24.663,37.825 ; R14.2 R14.2@24.663,37.825 ; DD3.22 25.55,38.292 25.082,37.825 R14.2@24.663,37.825
NetC23_1: C23.1 DD3.12 DD3.13 DD3.14 GB1.1 | length 47.9
  Top Layer w0.254: GB1.1 21.7,46.028 23.572,44.156 23.572,43.815 24.206,43.181 24.206,39.37 24.587,38.989 v1(29.591,38.989)
  Bottom Layer w0.254: DD3.14 DD3.13 27.432,42.45 27.432,42.926 27.407,42.951 27.05,42.951 DD3.12 27.05,43.843 27.076,43.87 28.499,43.87 29.239,43.129 30.556,43.129 30.886,43.459 31.75,43.459 32.6,42.609 32.6,39.599 34.29,39.599 34.646,39.954 ; v1(29.591,38.989) 29.516,39.064 29.516,41.326 29.544,41.354 31.979,41.354 32.004,41.328 32.004,39.037 32.385,38.656 34.29,38.656 34.646,39.011 34.646,39.954 ; C23.1 34.29,45.6 34.646,45.244 34.646,39.954
NetC24_1: C24.1 DD3.1 XS.1 | length 7.3
  Bottom Layer w0.254: XS.1 19.05,38.2 19.075,38.225 C24.1 20.955,38.225 20.955,39.334 21.571,39.95 DD3.1
NetC25_1: C25.1 DD3.19 DD3.20 L1.2 | length 12.6
  Bottom Layer w0.254: C25.1 25.675,34.98 26.035,34.62 L1.2@27.94,34.62 ; DD3.20 DD3.19 27.05,39.167 27.94,39.167 28.372,38.735 28.372,35.052 L1.2@27.94,34.62 ; L1.2 28.2,34.62 L1.2@27.94,34.62
NetC25_2: C25.2 DD3.21 | length 4.6
  Bottom Layer w0.254: DD3.21 26.05,38.456 26.075,38.43 27.395,38.43 27.725,38.1 C25.2
NetDA_3: DA.3 R20.1 | length 2.3
  Top Layer w0.254: R20.1 19.125,11.989 19.475,12.339 DA.3
NetDD1_37: DD1.37 R18.2 | length 8.3
  Top Layer w0.254: R18.2 29.21,37.925 30.635,36.5 DD1.37
NetDD1_99: DD1.99 R12.2 R13.1 | length 5.5
  Top Layer w0.254: DD1.99 48.765,41.5 49.175,41.91 R12.2 49.175,44.602 49,44.777 R13.1
NetDD2_2: DD2.2 R3.2 | length 4.7
  Top Layer w0.254: R3.2 23.206,29.675 23.206,28.575 23.75,28.031 DD2.2
NetDD2_3: DD2.3 R4.2 | length 12.1
  Top Layer w0.254: DD2.3 23.25,27.115 21.971,28.394 21.971,30.404 21.996,30.429 26.67,30.429 27.178,29.921 27.178,29.6 27.203,29.575 R4.2
NetDD2_20: DD2.20 XS2.2 | length 16.3
  Top Layer w0.254: DD2.20 28.575,22.75 28.931,22.394 28.931,14.922 29.643,14.21 XS2.2
NetDD2_21: DD2.21 XS2.1 | length 23.5
  Top Layer w0.254: DD2.21 36.896,23.25 37.286,22.86 37.286,13.335 36.891,12.94 XS2.1
NetDD2_22: DD2.22 XS2.6 | length 14.9
  Top Layer w0.254: DD2.22 31.776,23.75 32.156,24.13 v1(32.156,24.968)
  Bottom Layer w0.254: v1(32.156,24.968) 32.156,19.685 32.551,19.29 XS2.6
NetDD2_23: DD2.23 XS2.3 | length 37.8
  Top Layer w0.254: DD2.23 29.527,24.282 29.527,25.499 29.845,25.817 38.1,25.817 38.49,25.427 38.49,11.312 34.976,11.312 34.976,12.526 34.968,12.533 34.968,13.347 34.976,13.354 34.976,15.48 XS2.3
NetDD2_24: DD2.24 R5.1 | length 3.8
  Top Layer w0.254: DD2.24 26.568,24.75 26.993,25.175 R5.1
NetDD3_2: DD3.2 XS.3 | length 10.3
  Top Layer w0.254: v1(20.549,40.259) 20.549,41.275 20.904,41.631 v1(21.158,41.631)
  Bottom Layer w0.254: XS.3 18.771,39.5 18.796,39.525 18.796,41.275 19.152,41.631 v1(21.158,41.631) ; v1(20.549,40.259) 20.74,40.45 DD3.2
NetDD3_3: DD3.3 XS.2 | length 7.5
  Bottom Layer w0.254: XS.2 19.05,38.85 19.38,39.18 19.38,40.328 20.002,40.95 DD3.3
NetDD3_4: DD3.4 R19.1 | length 4.3
  Bottom Layer w0.254: R19.1 21.787,42.475 22.812,41.45 DD3.4
NetDD3_10: DD3.10 R17.2 | length 8.6
  Top Layer w0.254: v1(25.603,44.221) 25.603,46.355 v1(25.908,46.66)
  Bottom Layer w0.254: v1(25.603,44.221) 25.717,44.221 26.05,43.889 DD3.10 ; v1(25.908,46.66) 29.527,46.66 29.921,46.266 29.921,45.7 R17.2
NetG1_3: G1.3 U1.C4 | length 34.8
  Bottom Layer w0.254: G1.3 35.881,28.1 36.356,28.575 36.356,31.774 36.83,32.248 40.159,32.248 40.199,32.207 40.199,30.504 40.823,29.881 43.351,29.881 43.89,30.42 46.933,30.42 47.803,29.551 49.847,29.551 50.395,30.098 50.395,35.662 50.369,35.687 46.533,35.687 46.507,35.662 46.507,35.331 46.482,35.306 44.425,35.306 44.4,35.331 U1.C4
NetR1_2: R1.2 U1.B6 | length 2.1
  Bottom Layer w0.254: U1.B6 45.2,38.049 45.575,38.424 R1.2
NetR8_2: R8.2 XS2.4 | length 3.5
  Top Layer w0.254: R8.2 31.572,17 31.822,16.75 XS2.4
NetR9_2: R9.2 XS2.8 | length 13.2
  Top Layer w0.254: R9.2 30.025,18.288 33.998,18.288 34.938,19.228 36.512,19.228 36.931,19.647 36.931,21.411 36.512,21.83 XS2.8
NetR10_2: R10.2 XS2.7 | length 6.1
  Top Layer w0.254: R10.2 32.791,20.2 33.151,20.56 XS2.7
NetR11_2: R11.2 XS2.5 | length 8.3
  Top Layer w0.254: R11.2 30.025,15.748 34.29,15.748 34.696,16.154 34.696,17.995 34.722,18.02 XS2.5
NetR14_1: R14.1 R15.2 RK.2 | length 8.7
  Bottom Layer w0.254: RK.2 19.425,32.791 R15.2 19.425,34.925 19.781,35.281 23.851,35.281 23.876,35.306 23.876,35.975 R14.1
NetR19_2: R19.2 VD1.1 | length 3.9
  Bottom Layer w0.254: VD1.1 17.6,44.767 18.043,44.325 R19.2
NRST: DD1.14 XS1.5 | length 35
  Top Layer w0.254: DD1.14 39.3,42.831 39.688,42.443 v1(39.726,42.443) ; XS1.5 v1(52.222,29)
  Bottom Layer w0.254: v1(39.726,42.443) 39.726,45.402 40.297,45.974 51.752,45.974 52.222,45.504 v1(52.222,29)
PA1: DD1.24 DD2.14 G2.3 | length 71.1
  Top Layer w0.254: DD2.14 22.25,16.268 21.907,15.926 13.97,15.926 13.538,16.358 13.538,48.108 13.97,48.539 29.845,48.539 30.684,47.7 G2.3 33.972,47.7 34.3,47.372 DD1.24
PA2: DD1.25 DD2.12 | length 43.7
  Top Layer w0.254: v1(17.526,22.352) 17.526,22.221 18.098,21.65 20.637,21.65 20.955,21.967 20.955,22.25 DD2.12 ; v1(31.242,42.761) 31.242,44.145 31.75,44.653 33.775,44.653 33.8,44.628 DD1.25
  Bottom Layer w0.254: v1(17.526,22.352) 17.526,28.575 17.924,28.973 29.443,28.973 29.477,29.007 29.477,37.782 28.914,38.346 28.914,42.227 29.447,42.761 v1(31.242,42.761)
PA4: DD1.29 U1.C3 | length 19
  Top Layer w0.254: DD1.29 33.096,40.5 33.642,39.954 v1(37.668,39.954)
  Bottom Layer w0.254: v1(37.668,39.954) 37.668,34.459 38.419,33.708 42.962,33.708 43.192,33.938 43.192,34.246 43.846,34.9 U1.C3
PA6: DD1.31 U1.E3 | length 15.5
  Top Layer w0.254: DD1.31 36.779,39.5 37.341,38.938 38.1,38.938 38.591,38.447 v1(38.591,34.493)
  Bottom Layer w0.254: v1(38.591,34.493) 42.775,34.493 U1.E3
PA7: DD1.32 DD2.11 | length 61.3
  Top Layer w0.254: v1(14.224,47.676) 20.396,47.676 20.701,47.981 24.867,47.981 25.222,47.625 25.222,46.054 23.936,44.767 23.936,44.133 24.572,43.496 24.572,40.005 24.901,39.676 30.244,39.676 30.92,39 DD1.32 ; v1(19.71,22.327) 20.134,22.75 DD2.11
  Bottom Layer w0.254: v1(14.224,47.676) 13.995,47.676 13.97,47.65 13.97,21.984 14.287,21.666 19.367,21.666 19.71,22.009 v1(19.71,22.327)
PA9: DD1.68 DD3.6 | length 41.3
  Top Layer w0.254: v1(22.838,43.917) 22.838,43.427 23.473,42.792 23.473,37.211 23.511,37.173 28.308,37.173 28.651,36.83 28.651,35.522 28.626,35.496 27.661,35.496 26.772,34.608 26.772,32.703 27.19,32.284 29.21,32.284 29.651,31.843 29.651,28.194 30.162,27.682 31.85,27.682 33.426,29.258 42.266,29.258 42.3,29.224 DD1.68
  Bottom Layer w0.254: v1(22.838,43.917) 23.054,43.917 23.473,43.497 23.473,42.45 DD3.6
PA10: DD1.69 DD3.5 | length 40.2
  Top Layer w0.254: v1(33.96,40.64) 34.35,40.64 34.646,40.344 36,40.344 36.296,40.64 38.189,40.64 38.675,40.154 40.005,40.154 40.005,37.78 40.573,37.213 40.573,30.62 40.957,30.235 42.41,30.235 42.8,29.845 DD1.69
  Bottom Layer w0.254: DD3.5 23.177,41.95 22.784,42.344 22.784,42.998 22.161,43.621 22.161,44.212 23.455,45.506 26.014,45.506 26.721,44.932 33.478,44.932 33.96,44.45 v1(33.96,40.64)
PA13: DD1.72 XS1.4 | length 11.7
  Top Layer w0.254: DD1.72 44.3,25.717 44.668,25.349 50.8,25.349 51.15,25.699 XS1.4
PA14: DD1.76 XS1.2 | length 2.8
  Top Layer w0.254: DD1.76 48.311,30 49.311,29 XS1.2
PB6: DD1.92 U1.G5 | length 21.2
  Top Layer w0.254: v1(41.885,38.43) 41.885,37.114 41.325,36.555 41.325,32.282 42.484,31.123 43.48,31.123 44.679,32.321 44.679,37.594 45.085,38 DD1.92
  Bottom Layer w0.254: U1.G5 41.2,36.73 41.605,37.135 41.605,38.1 41.885,38.379 v1(41.885,38.43)
PB7: DD1.93 U1.D2 | length 11
  Top Layer w0.254: v1(43.356,32.832) 43.356,37.084 43.554,37.282 43.554,38.366 43.688,38.5 DD1.93
  Bottom Layer w0.254: v1(43.356,32.832) 43.356,33.601 43.585,33.831 43.585,34.086 U1.D2
PB8: DD1.95 U1.C2 | length 15.1
  Top Layer w0.254: v1(43.2,31.8) 43.2,32.031 42.679,32.552 42.679,36.907 43.2,37.428 43.2,38.725 43.975,39.5 DD1.95
  Bottom Layer w0.254: v1(43.2,31.8) 43.56,31.8 44.029,32.269 44.041,33.105 44.008,33.138 44.008,33.462 44.251,33.706 44.4,33.706 U1.C2
PB9: DD1.96 U1.C1 | length 18.5
  Top Layer w0.254: v1(42.002,32.563) 42.002,36.731 42.846,37.575 42.846,39.031 43.815,40 DD1.96
  Bottom Layer w0.254: U1.C1 44.369,31.128 43.597,31.128 43.591,31.123 42,31.123 42,32.272 v1@42.145,32.417 ; v1@42.145,32.417 42.291,32.563 v1(42.002,32.563) 42.002,32.56 v1@42.145,32.417
PB11: DD1.48 DD2.16 | length 31
  Top Layer w0.254: DD2.16 23.25,20.362 v1(23.597,20.015) ; v1(30.785,31.242) 31.027,31 DD1.48
  Bottom Layer w0.254: v1(23.597,20.015) 23.597,22.898 23.177,23.317 18.732,23.317 18.288,23.762 18.288,27.94 18.605,28.258 29.502,28.258 29.845,28.6 29.845,30.924 30.162,31.242 v1(30.785,31.242)
PB12: DD1.51 DD2.17 | length 17.7
  Top Layer w0.254: DD2.17 23.75,21.081 24.13,20.701 v1(25.26,20.701) ; v1(33.483,26.848) 33.8,27.165 DD1.51
  Bottom Layer w0.254: v1(25.26,20.701) 25.26,26.391 25.717,26.848 v1(33.483,26.848)
PB13: DD1.52 DD2.18 | length 37.7
  Top Layer w0.254: v1(23.444,18.034) 23.444,18.847 24.621,20.024 25.908,20.024 25.937,20.053 25.937,21.273 25.514,21.696 24.25,21.696 DD2.18 ; DD1.52 34.3,26.987 34.694,26.594 39.101,26.594 39.66,26.035 v1(39.66,19.025)
  Bottom Layer w0.254: v1(23.444,18.034) 34.29,18.034 35.281,19.025 v1(39.66,19.025)
PC1: DD1.16 DD2.13 DD3.8 R16.1 | length 72
  Top Layer w0.254: v1(19.228,45.644) 19.367,45.644 19.863,45.148 19.863,36.195 19.126,35.458 17.145,35.458 16.764,35.077 16.764,21.666 17.145,21.285 21.75,21.285 DD2.13 ; v1(24.613,44.475) 24.926,44.162 24.926,43.561 24.952,43.536 26.035,43.536 26.352,43.853 26.352,45.529 v1(26.797,45.974) 27.114,45.657 27.114,40.64 27.432,40.322 v1(30.625,40.322) ; v1(37.592,42.443) 37.881,42.443 38.3,42.862 DD1.16
  Bottom Layer w0.254: v1(19.228,45.644) 23.05,45.644 23.266,45.86 26.797,45.86 v1@27.071,45.7 ; v1(24.613,44.475) 24.892,44.196 24.892,43.866 25.05,43.708 DD3.8 ; v1(26.797,45.974) v1@27.071,45.7 ; R16.1 v1@27.071,45.7 ; v1(30.625,40.322) 30.625,38.031 31.115,37.541 35.56,37.541 36,37.981 36,39.645 37.592,41.237 v1(37.592,42.443)
PC4: DD1.33 DD2.8 | length 39.8
  Top Layer w0.254: v1(18.974,24.562) 18.694,24.562 18.669,24.536 18.669,24.384 19.05,24.003 20.371,24.003 20.618,24.25 DD2.8 ; v1(30.645,28.359) 31.665,28.359 32.918,29.612 37.686,29.612 37.715,29.642 37.715,38.1 37.315,38.5 DD1.33
  Bottom Layer w0.254: v1(18.974,24.562) 18.974,27.381 19.367,27.775 29.769,27.775 30.353,28.359 v1(30.645,28.359)
PC5: DD1.34 DD2.7 | length 41.4
  Top Layer w0.254: v1(20.041,24.74) 20.051,24.75 DD2.7 ; DD1.34 37.033,38 v1(37.033,30.302)
  Bottom Layer w0.254: v1(20.041,24.74) 23.812,24.74 24.282,24.27 24.282,20.498 24.765,20.015 26.06,20.015 31.953,25.908 36.589,25.908 37.033,26.352 v1(37.033,30.302)
PC6: DD1.63 U1.F4 | length 19.6
  Top Layer w0.254: v1(38.417,31.217) 38.417,31.585 39.535,32.703 v1(39.535,36.411) ; DD1.63 39.8,26.528 41.055,25.273 v1(41.377,25.273)
  Bottom Layer w0.254: v1(38.417,31.217) 38.417,30.281 41.377,27.322 v1(41.377,25.273) ; v1(39.535,36.411) 39.827,36.411 40.145,36.093 41.975,36.093 42,36.068 U1.F4
PC7: DD1.64 U1.G4 | length 25.9
  Top Layer w0.254: v1(39.268,39.472) 39.319,39.472 39.345,37.605 40.212,36.737 40.212,32.067 39.691,31.547 v1(39.522,31.547) ; DD1.64 40.3,27.391 40.691,27 v1(40.691,26.949)
  Bottom Layer w0.254: v1(39.268,39.472) 39.256,39.472 38.837,39.052 38.862,35.7 U1.G4 ; v1(39.522,31.547) 39.082,31.547 38.735,31.894 38.1,31.894 37.715,31.509 37.715,27.305 38.071,26.949 v1(40.691,26.949)
PC13: DD1.7 DD3.7 | length 26.2
  Top Layer w0.254: v1(32.944,43.866) 32.944,42.964 34.201,41.707 36.307,41.707 36.601,41.412 40.122,41.412 41.013,40.522 41.787,40.522 42.222,40.957 42.222,41.332 42.8,41.91 DD1.7
  Bottom Layer w0.254: DD3.7 24.55,43.764 24.519,43.795 24.273,43.795 23.936,44.133 23.936,44.767 24.32,45.152 25.659,45.152 25.904,44.907 25.985,44.907 26.314,44.578 32.499,44.578 32.944,44.133 v1(32.944,43.866)
PD3: DD1.84 DD2.15 | length 48.9
  Top Layer w0.254: DD2.15 22.75,16.125 23.177,15.697 v1(23.216,15.697) ; v1(47.269,28.12) 46.497,28.892 46.497,33.964 46.533,34 DD1.84
  Bottom Layer w0.254: v1(23.216,15.697) 34.455,15.697 35.547,16.789 46.914,16.789 47.269,17.145 v1(47.269,28.12)
PE0: DD1.97 U1.F3 | length 17.3
  Top Layer w0.254: DD1.97 50.838,40.5 51.333,40.005 v1(51.333,37.401)
  Bottom Layer w0.254: U1.F3 42,35.281 42.977,35.306 43.764,36.093 50.279,36.093 51.333,37.148 v1(51.333,37.401)
PE1: DD1.98 U1.G3 | length 23.5
  Top Layer w0.254: v1(46.253,41.046) 46.3,41 DD1.98
  Bottom Layer w0.254: U1.G3 41.175,35.306 38.506,35.306 38.481,35.331 38.481,40.03 38.964,40.513 42.227,40.513 42.621,40.907 42.621,42.862 43.159,43.4 47.515,43.358 47.515,42.308 v1(46.253,41.046)
PE4: DD1.3 U1.E5 | length 23.8
  Top Layer w0.254: DD1.3 44.8,44.767 45.27,45.237 v1(46.025,45.237)
  Bottom Layer w0.254: U1.E5 42.825,36.906 49.797,36.906 51.308,38.417 51.308,44.767 50.838,45.237 v1(46.025,45.237)
PE5: DD1.4 U1.F5 | length 9.8
  Top Layer w0.254: DD1.4 44.3,42.748 v1(44.653,42.395)
  Bottom Layer w0.254: U1.F5 42.367,36.5 42.393,36.525 42.393,37.71 42.418,37.735 44.288,37.735 44.653,38.1 v1(44.653,42.395)
PE6: DD1.5 U1.G6 | length 7.9
  Top Layer w0.254: v1(41.2,39.257) 41.865,39.257 43.8,41.192 DD1.5
  Bottom Layer w0.254: U1.G6 v1(41.2,39.257)
pads on no net: DD1.1 DD1.2 DD1.8 DD1.9 DD1.15 DD1.17 DD1.18 DD1.21 DD1.22 DD1.23 DD1.26 DD1.30 DD1.35 DD1.36 DD1.38 DD1.39 DD1.40 DD1.41 DD1.42 DD1.43 DD1.44 DD1.45 DD1.46 DD1.47 DD1.53 DD1.54 DD1.55 DD1.56 DD1.57 DD1.58 DD1.59 DD1.60 DD1.61 DD1.62 DD1.65 DD1.66 DD1.67 DD1.70 DD1.71 DD1.77 DD1.78 DD1.79 DD1.80 DD1.81 DD1.82 DD1.83 DD1.85 DD1.86 DD1.87 DD1.88 DD1.89 DD1.90 DD1.91 DD2.10 DD2.25 DD3.9 DD3.23 DD3.25 U1.A2 U1.A4 U1.A5 U1.A6 U1.B2 U1.B4 U1.B5 U1.C5 U1.C6 U1.D6 U1.E1 U1.E2 U1.E4 U1.E6 U1.F1 U1.F2 U1.F6 U1.G1 U1.G2 XS2.MH1 XS2.MH2 ZQ1. ZQ1.3 ZQ1.4 ZQ2. ZQ2.3 ZQ2.4

## Silkscreen, mask and mechanical layers (free items; w line width, h text height)
Mechanical 7:
  text "BOASFORMAT|А3|1|0|883070867|165354330|1000000000|2:1|" at 0,2540 h0
  text "DimH|-314960|0|74685039|981062992|-16338582|5944882|2||||js12|True|True|False|False" at 189.702,2491.97 h0
  text "DimH|-31417323|0|58307087|981062992|-17440945|6968504|2||||js12|True|True|False|False" at 148.1,2491.9 h0
  text "DimV|39370|-31456693|123818898|981023622|6377952|-15787402|2||||js12|True|True|False|False" at 314.5,2491.8 h0
  text "DimH|-31456693|0|58307087|981023622|-16377953|6023622|2||||js12|True|True|False|False" at 148.13,2491.67 h0
  text "SET2|Superlayer=MechanicalLayer7|Wsuperlayer=MechanicalLayer8|Layergrid=MechanicalLayer9|Werase=MechanicalLayer11|Layermark=MechanicalLayer12|Layerstamp=MechanicalLayer13|Thinline=0,18|Basicline=0,6|Gridline=0,18|Boardline=0,6|Contourpolygonline=0,6|PcbGridStep=1|PcbGridCleareanceAtView=0|PcbGridNumberEach=l4|PcbGridLineEach=l2|PcbGridCountSecondaryStrip=1|PcbGridEnabledStrip=True|PcbSignalGridEnabled=True|PcbSignalShowBukva=True|RealSignalLayerNames=False|PcbGridEnabledBothSide=False|PcbPolarGridEnabled=False|PcbPolarGridAngleStep=10|PcbPolarGridRadialStep=10|PcbPolarGridCenterPcbGrid=False|SilkShowPad=True|SilkViewName=Слой маркировки|SilkShowHole=True|SilkShowAxis=True|SilkShowBukva=True|SilkShowGrid=False|SolderShowGrid=False|SolderViewName=Слой маски|SolderShowAxis=False|SolderShowBukva=False|MainViewShowGrid=False|MainViewUseShapesDrill=False|ShowBukvaOnSboky=True|Density=2,2|TableName=Таблица 1|RazrezWidth=100|RealLayerNames=False|RazrezShowBukva=False|RazrezBukva=В-В|Sher=Rz 160|Asstoplayer=TopOverlay|Asstoplayer2=None|Assbottomlayer=BottomOverlay|Assbottomlayer2=None|AssMinDiameterHoles=0,1|AssDim=False|AssMech=False|AssSilk=False|AssComponentSilk=False|AssFreeSilk=False|AssSmdPads=True|AssGridEnable=False|Mirror=Horisontal|PcbGridFontSize=5|PcbGridCenterZero=False|TTStampDistance=12|MainFontSize=5|PolyShtrihEnable=True|RegionShtrihEnable=False|PolyStep=2|PcbDrillDrawingGridEnabled=False|PcbDrillDrawingViewName=Слой сверловки|PcbDrillDrawingShowBukva=False|PcbDrillDrawingShowAxis=False|PcbSignalLayersUseDrill=False|PcbSignalLayersUseShapesDrill=False|PcbSignalLayersShowAxis=False" at 0,0.025 h0
  text "2STAMP|Разработал|Гончар" at 0,0 h0
  text "2STAMP|Проверил|Колбун" at 0,0 h0
  text "2STAMP|Техконтроль|" at 0,0 h0
  text "2STAMP|Начальник отдела|" at 0,0 h0
  text "2STAMP|Нормоконтроль|" at 0,0 h0
  text "2STAMP|Утвердил|" at 0,0 h0
  text "2STAMP|Var|" at 0,0 h0
  text "2STAMP|Tech|" at 0,0 h0
  text "2STAMP|Normo|" at 0,0 h0
  text "2STAMP|Check|Пров." at 0,0 h0
  text "2STAMP|Design|Разраб." at 0,0 h0
  text "2STAMP|Utv|" at 0,0 h0
  text "2STAMP|Обозначение|ГУИР.469319.045 СБ" at 0,0 h0
  text "2STAMP|Первичная применяемость|" at 0,0 h0
  text "2STAMP|Компания1|" at 0,0 h0
  text "2STAMP|Наименование1|IP-Видеокамера мобильная" at 0,0 h0
  text "2STAMP|ТипДокумента|Сборочный чертеж" at 0,0 h0
  text "2STAMP|Материал1|" at 0,0 h0
  text "2STAMP|Материал2|" at 0,0 h0
  text "2STAMP|Масса|" at 0,0 h0
  text "2STAMP|Lit|" at 0,0 h0
  text "2STAMP|Наименование2|" at 0,0 h0
  text "2STAMP|Компания2|ПИКС, гр. 913801" at 0,0 h0
  text "STAMP|Разработал|Гончар" at 0,0 h0
  text "STAMP|Проверил|Колбун" at 0,0 h0
  text "STAMP|Техконтроль|" at 0,0 h0
  text "STAMP|Начальник отдела|" at 0,0 h0
  text "STAMP|Нормоконтроль|" at 0,0 h0
  text "STAMP|Утвердил|" at 0,0 h0
  text "STAMP|Var|" at 0,0 h0
  text "STAMP|Tech|" at 0,0 h0
  text "STAMP|Normo|" at 0,0 h0
  text "STAMP|Check|Пров." at 0,0 h0
  text "STAMP|Design|Разраб." at 0,0 h0
  text "STAMP|Utv|" at 0,0 h0
  text "STAMP|Обозначение|ГУИР.758723.045" at 0,0 h0
  text "STAMP|Первичная применяемость|" at 0,0 h0
  text "STAMP|Компания1|" at 0,0 h0
  text "STAMP|Наименование1|IP-Видеокамера мобильная" at 0,0 h0
  text "STAMP|ТипДокумента|" at 0,0 h0
  text "STAMP|Материал1|" at 0,0 h0
  text "STAMP|Материал2|" at 0,0 h0
  text "STAMP|Масса|" at 0,0 h0
  text "STAMP|Lit|" at 0,0 h0
  text "STAMP|Наименование2|чертёж платы" at 0,0 h0
  text "STAMP|Компания2|ПИКС, гр. 913801" at 0,0 h0
  text "BOASVIADRILLTABLE:none,157480,67," at 0,0 h0
  text "2BOASDRILLTABLE:none,300000,Нет,3,True,|none,314961,Да,2,True,|none,354331,Да,2,True,|none,381890,Да,8,True,|none,1279528,Нет,2,True," at 0,0 h0
Mechanical 8:
  region: 330.792,2411.992 331.439,2413.685 331.93,2417.399 330.796,2417.4 330.795,2416.468 331.358,2416.9 330.703,2411.993
  region: 330.608,2411.992 329.961,2413.685 329.47,2417.399 330.604,2417.4 330.605,2416.468 330.042,2416.9 330.697,2411.993
  region: 330.608,2491.708 329.961,2490.015 329.47,2486.301 330.604,2486.3 330.605,2487.232 330.042,2486.8 330.697,2491.707
  region: 330.792,2491.708 331.439,2490.015 331.93,2486.301 330.796,2486.3 330.795,2487.232 331.358,2486.8 330.703,2491.707
  region: 189.794,2506.978 191.487,2506.331 195.201,2505.84 195.202,2506.974 194.27,2506.975 194.702,2506.412 189.794,2507.067
  region: 189.794,2507.162 191.487,2507.809 195.201,2508.3 195.202,2507.166 194.27,2507.165 194.702,2507.728 189.794,2507.073
  region: 188.809,2507.162 187.117,2507.809 183.402,2508.3 183.402,2507.166 184.333,2507.165 183.902,2507.728 188.809,2507.073
  region: 188.809,2506.978 187.117,2506.331 183.402,2505.84 183.402,2506.974 184.333,2506.975 183.902,2506.412 188.809,2507.067
  region: 148.038,2507.062 146.345,2507.709 142.631,2508.2 142.63,2507.066 143.562,2507.065 143.13,2507.628 148.038,2506.973
  region: 148.038,2506.878 146.345,2506.231 142.631,2505.74 142.63,2506.874 143.562,2506.875 143.13,2506.312 148.038,2506.967
  region: 68.323,2506.878 70.015,2506.231 73.73,2505.74 73.73,2506.874 72.799,2506.875 73.23,2506.312 68.323,2506.967
  region: 68.323,2507.062 70.015,2507.709 73.73,2508.2 73.73,2507.066 72.799,2507.065 73.23,2507.628 68.323,2506.973
Mechanical 9:
  region: 330.7,2411.9 330.042,2416.9 330.7,2416.4 331.358,2416.9
  region: 330.7,2491.8 331.358,2486.8 330.7,2487.3 330.042,2486.8
  region: 189.702,2507.07 194.702,2507.728 194.202,2507.07 194.702,2506.412
  region: 188.902,2507.07 183.902,2506.412 184.402,2507.07 183.902,2507.728
  region: 148.13,2506.97 143.13,2506.312 143.63,2506.97 143.13,2507.628
  region: 68.23,2506.97 73.23,2507.628 72.73,2506.97 73.23,2506.312
  lines w0.18: 68.23,2491.67 68.23,2507.97 ; 68.23,2506.97 148.13,2506.97 ; 148.13,2491.67 148.13,2507.97 ; 169.98,2507.07 184.98,2507.07 ; 188.902,2491.97 188.902,2508.07 ; 189.702,2491.97 189.702,2508.07 ; 314.5,2411.9 331.7,2411.9 ; 314.6,2491.8 331.7,2491.8 ; 330.7,2411.9 330.7,2491.8
  text "40" at 90,2509.5 h7.68
  text "0.4" at 175,2508 h7.68
  text "40" at 328.17,2433.67 h7.68 r90
Mechanical 13:
  lines w0.18: 230,2253 295,2253 ; 230,2258 295,2258 ; 230,2263 295,2263 ; 230,2268 295,2268 ; 230,2273 295,2273 ; 230,2288 295,2288 ; 230,2293 295,2293 ; 230,2298 295,2298 ; 369.96,2268 369.96,2283 ; 374.98,2268 374.98,2283 ; 391.7,2522.1 394.8,2516.7 400.4,2526.5
  lines w0.6: 8,2273 20,2273 ; 8,2308 20,2308 ; 8,2333 20,2333 ; 8,2358 20,2358 ; 8,2475 20,2475 ; 13,2248 13,2393 ; 13,2415 13,2535 ; 20,2393 8,2393 8,2248 20,2248 ; 20,2415 8,2415 8,2535 20,2535 ; 20,2521 90,2521 90,2535 ; 230,2248 230,2303 415,2303 ; 230,2278 295,2278 ; 230,2283 295,2283 ; 237,2278 237,2303 ; 247,2248 247,2303 ; 270,2248 270,2303 ; 285,2248 285,2303 ; 295,2248 295,2303 415,2303 ; 295,2263 365,2263 415,2263 ; 295,2288 415,2288 ; 344,2524 349,2515 356.6,2529 ; 356.7,2529 407,2529 ; 365,2248 365,2288 ; 365,2268 415,2268 ; 365,2283 380,2283 415,2283 ; 380,2268 380,2288 ; 385.57,2263 385.57,2268 ; 397,2268 397,2288 ; 415,2311 415,2303 ; 20,2248 415,2248 415,2535 20,2535 ; 20,2248 20,2535
  text "ГУИР.758723.045" at 74.076,2530.197 h7.68 r180
  text "Rz 160" at 356.7,2516.7 h10.75
  text "(" at 388,2516.7 h10.75
  text ")" at 399,2516.7 h10.75
  text "Перв. примен." at 12.037,2494.974 h5.38 r90
  text "Справ. №" at 12.037,2437.498 h5.38 r90
  text "Подп. и дата" at 12.037,2365.566 h5.38 r90
  text "Инв. № дубл." at 12.037,2336.08 h5.38 r90
  text "Взам. инв. №" at 12.037,2311.101 h5.38 r90
  text "ГУИР.758723.045" at 335.924,2293.303 h7.68
  text "Лит." at 369.194,2283.963 h5.38
  text "Масса" at 383.914,2283.963 h5.38
  text "Масштаб" at 398.834,2283.963 h5.38
  text "Подп. и дата" at 12.037,2281.066 h5.38 r90
  text "IP-Видеокамера мобильная" at 300.269,2280.803 h7.68
  text "Изм." at 230.571,2278.963 h5.38
  text "Лист" at 237.856,2278.963 h5.38
  text "№ докум." at 251.998,2278.963 h5.38
  text "Подп." at 273.772,2278.963 h5.38
  text "Дата" at 285.793,2278.963 h5.38
  text "Разраб." at 230.533,2273.771 h5.38
  text "Гончар" at 247.68,2273.771 h5.38
  text "2:1" at 402.788,2273.303 h7.68
  text "чертёж платы" at 314.059,2272.803 h7.68
  text "Пров." at 230.533,2268.771 h5.38
  text "Колбун" at 247.68,2268.771 h5.38
  text "Лист" at 366.442,2263.771 h5.38
  text "Листов" at 387.485,2263.771 h5.38
  text "1" at 407.397,2263.771 h5.38
  text "Инв. № подл." at 12.037,2251.08 h5.38 r90
  text "ПИКС, гр. 913801" at 371.652,2250.303 h7.68
  text "Копировал" at 305.533,2243.771 h5.38
  text "Формат А3" at 386.274,2243.771 h5.38

## Text inside footprints (layer, text, board x,y; h text height)
GB1: Top Overlay "+" at 19.3,46.423 h1.15
ZBOAS141392602: Mechanical 12 "-" at 128.552,2290.153 h7.68; Mechanical 12 "Нет" at 160.417,2290.153 h7.68; Mechanical 12 "3,25" at 88.11,2290.153 h7.68; Mechanical 12 "2" at 190.748,2290.153 h7.68; Mechanical 12 "1,5" at 127.07,2298.903 h7.68; Mechanical 12 "Да" at 161.894,2298.903 h7.68; Mechanical 12 "0,97" at 87.91,2298.903 h7.68; Mechanical 12 "8" at 190.926,2298.903 h7.68; Mechanical 12 "1,5" at 127.07,2306.903 h7.68; Mechanical 12 "Да" at 161.894,2306.903 h7.68; Mechanical 12 "0,9" at 89.443,2306.903 h7.68; Mechanical 12 "2" at 190.748,2306.903 h7.68; Mechanical 12 "1,6" at 127.23,2314.903 h7.68; Mechanical 12 "Да" at 161.894,2314.903 h7.68; Mechanical 12 "0,8" at 89.52,2314.903 h7.68; Mechanical 12 "2" at 190.748,2314.903 h7.68; Mechanical 12 "1,5" at 127.07,2322.903 h7.68; Mechanical 12 "Нет" at 160.417,2322.903 h7.68; Mechanical 12 "0,76" at 88.23,2322.903 h7.68; Mechanical 12 "3" at 190.966,2322.903 h7.68; Mechanical 12 "0,9" at 126.204,2330.903 h7.68; Mechanical 12 "переходное" at 45.735,2330.903 h7.68; Mechanical 12 "Да" at 161.894,2330.903 h7.68; Mechanical 12 "0,4" at 89.858,2330.903 h7.68; Mechanical 12 "67" at 189.316,2330.903 h7.68; Mechanical 12 "отв." at 188.087,2338.653 h7.68; Mechanical 12 "Кол." at 188.301,2346.153 h7.68; Mechanical 12 "металлизации" at 148.946,2338.653 h7.68; Mechanical 12 "Наличие" at 155.866,2346.153 h7.68; Mechanical 12 "площадки, мм" at 114.674,2338.653 h7.68; Mechanical 12 "Диаметр конт." at 113.4,2346.153 h7.68; Mechanical 12 "мм" at 89.885,2338.653 h7.68; Mechanical 12 "Диаметр отв.," at 77.428,2346.153 h7.68; Mechanical 12 "отв." at 50.566,2338.653 h7.68; Mechanical 12 "Обозначение" at 41.038,2346.153 h7.68; Mechanical 12 "Таблица 1" at 35.9,2353.6 h7.68
ZBOAS268594952: Mechanical 7 "40" at 145.254,2402.6 h7.68; Mechanical 7 "36" at 137.454,2402.6 h7.68; Mechanical 7 "32" at 129.265,2402.6 h7.68; Mechanical 7 "28" at 121.18,2402.6 h7.68; Mechanical 7 "24" at 113.518,2402.6 h7.68; Mechanical 7 "20" at 105.1,2402.6 h7.68; Mechanical 7 "16" at 98.241,2402.6 h7.68; Mechanical 7 "12" at 90.051,2402.6 h7.68; Mechanical 7 "8" at 82.705,2402.6 h7.68; Mechanical 7 "4" at 75.086,2402.6 h7.68; Mechanical 7 "0" at 66.625,2402.6 h7.68; Mechanical 7 "40" at 58.309,2489.603 h7.68; Mechanical 7 "36" at 58.709,2481.603 h7.68; Mechanical 7 "32" at 58.33,2473.603 h7.68; Mechanical 7 "28" at 58.159,2465.603 h7.68; Mechanical 7 "24" at 58.837,2457.603 h7.68; Mechanical 7 "20" at 58,2449.603 h7.68; Mechanical 7 "16" at 60.281,2441.603 h7.68; Mechanical 7 "12" at 59.903,2433.603 h7.68; Mechanical 7 "8" at 61.209,2425.603 h7.68; Mechanical 7 "4" at 61.971,2417.603 h7.68; Mechanical 7 "0" at 61.049,2409.603 h7.68
ZBOAS923294952: Mechanical 7 "40" at 311.554,2402.6 h7.68; Mechanical 7 "36" at 303.754,2402.6 h7.68; Mechanical 7 "32" at 295.565,2402.6 h7.68; Mechanical 7 "28" at 287.48,2402.6 h7.68; Mechanical 7 "24" at 279.818,2402.6 h7.68; Mechanical 7 "20" at 271.4,2402.6 h7.68; Mechanical 7 "16" at 264.541,2402.6 h7.68; Mechanical 7 "12" at 256.351,2402.6 h7.68; Mechanical 7 "8" at 249.005,2402.6 h7.68; Mechanical 7 "4" at 241.386,2402.6 h7.68; Mechanical 7 "0" at 232.925,2402.6 h7.68; Mechanical 7 "40" at 224.609,2489.603 h7.68; Mechanical 7 "36" at 225.009,2481.603 h7.68; Mechanical 7 "32" at 224.63,2473.603 h7.68; Mechanical 7 "28" at 224.459,2465.603 h7.68; Mechanical 7 "24" at 225.137,2457.603 h7.68; Mechanical 7 "20" at 224.3,2449.603 h7.68; Mechanical 7 "16" at 226.581,2441.603 h7.68; Mechanical 7 "12" at 226.203,2433.603 h7.68; Mechanical 7 "8" at 227.509,2425.603 h7.68; Mechanical 7 "4" at 228.271,2417.603 h7.68; Mechanical 7 "0" at 227.349,2409.603 h7.68